# Altium PCB 175-00061, rev2, PCB, NRES Crate Slot MotherBoard.PcbDoc (part 2 of 2)
Units mm, origin at the board's own origin, x right, y up, seen from the top; angles counter-clockwise.
Board outline 222 x 100 mm, 6 copper layers (Top Layer (*.GTL), MidLayer1 (*G1), InternalPlane1 (*.GP1), InternalPlane2 (*.GP2), InternalPlane3 (*.GP3), Bottom Layer (*GBL)); 58 components, 62 nets, 611 pads, 118 vias.
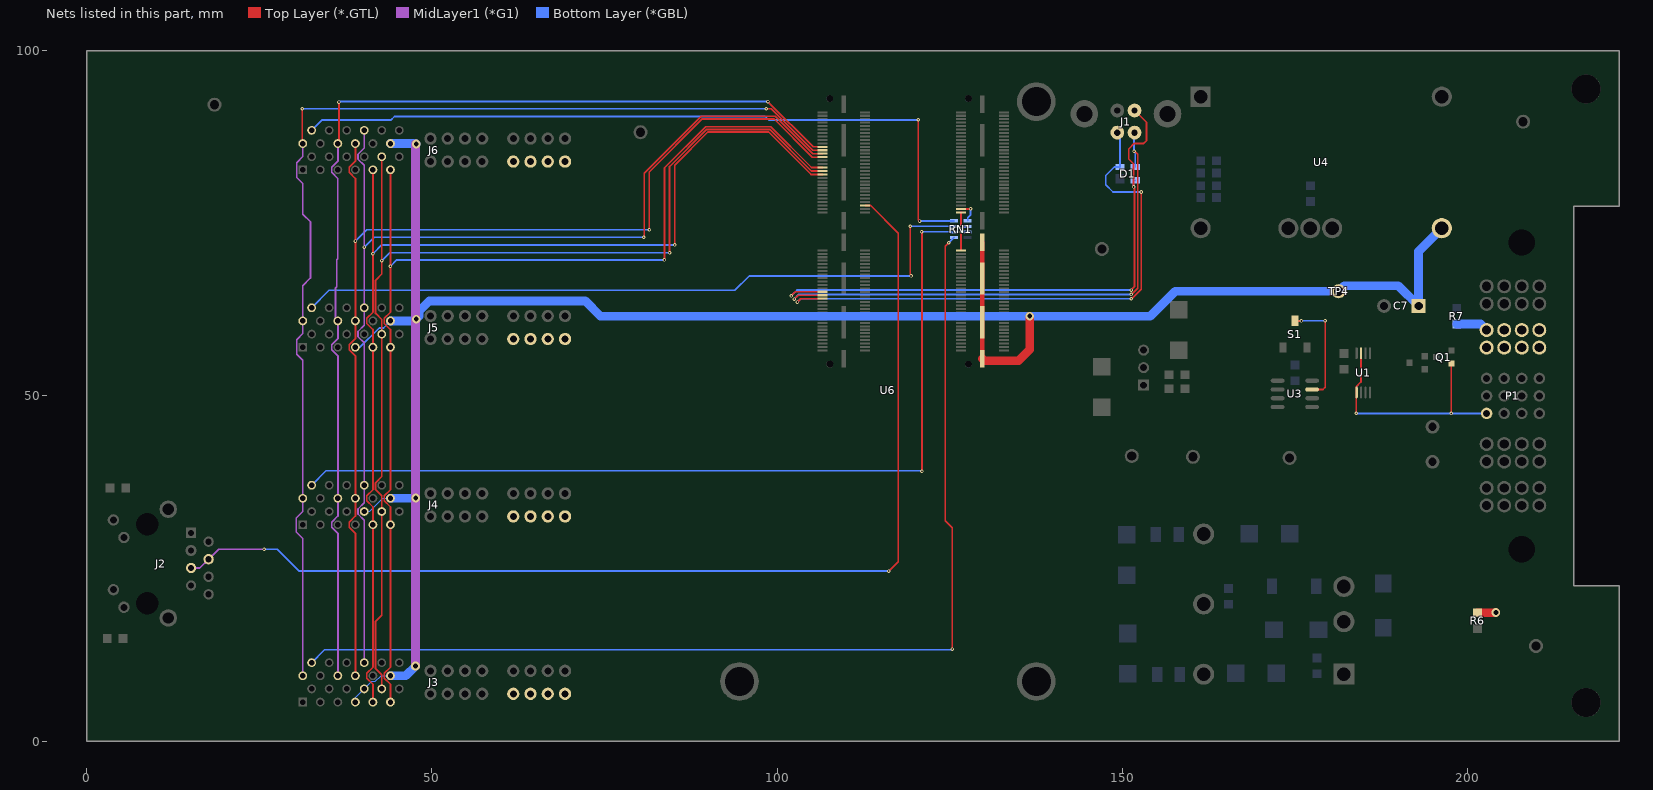
[diagram p6: the nets of this part, all layers, seen from the top]

## Via types
v1: diameter 0.508, hole 0.254, Top Layer (*.GTL) to Bottom Layer (*GBL), tented both sides, 100 vias
v2: diameter 1.27, hole 0.711, Top Layer (*.GTL) to Bottom Layer (*GBL), 18 vias

## Nets (pads, with @x,y where several pads share a name; then routed paths per layer and width w, separated by ;. In a path a pad name is that pad's centre, name@x,y a point inside that pad or via, vN(x,y) a via of type N, cw(c..) or ccw(c..) an arc to the next point about the centre after c; other vN are vias at no path point) (continued)
NetRN1_4: RN1.4 U6.B59 | length 3.6
  Top Layer (*.GTL) w0.254: U6.B59@126.651,71.078 126.651,73.757 v1(126.659,73.765)
  Bottom Layer (*GBL) w0.254: v1(126.659,73.765) RN1.4@127.599,73.765
NetRN1_6: RN1.6 U6.B61 | length 3
  Top Layer (*.GTL) w0.254: U6.B61@126.651,76.578 126.651,74.561 v1(126.685,74.527)
  Bottom Layer (*GBL) w0.254: v1(126.685,74.527) 127.561,74.527 RN1.6@127.599,74.565
NetRN1_8: RN1.8 U6.B63 | length 3.3
  Top Layer (*.GTL) w0.254: U6.B63@126.651,77.078 127.991,77.078 v1(128.031,77.118)
  Bottom Layer (*GBL) w0.254: RN1.8@127.599,75.365 127.599,75.823 128.031,76.255 v1(128.031,77.118)
NetS1_2: S1.2 U3.7 | length 16
  Top Layer (*.GTL) w0.254: S1.2@175.045,60.858 v1(175.946,60.858) ; U3.7@177.506,50.927 179.07,50.927 179.4,51.257 179.4,60.858 v1(179.375,60.884)
  Bottom Layer (*GBL) w0.254: v1(175.946,60.858) 175.971,60.884 v1(179.375,60.884)
SCLK: J3.11 J4.11 J5.11 J6.11 U6.A87 | length 160.5
  Top Layer (*.GTL) w0.254: J3.11@43.989,5.643 43.989,8.195 43.1,9.084 43.1,9.821 43.989,10.71 J4.11@43.989,31.343 43.989,33.895 43.1,34.784 43.1,35.521 43.989,36.41 J5.11@43.989,57.042 43.989,59.595 43.1,60.484 43.1,61.221 43.989,62.11 v1(43.989,68.787) J6.11@43.989,82.742 ; v1(83.682,69.698) 83.682,83.029 89.633,88.98 99.079,88.98 104.98,83.078 U6.A87@106.581,83.078
  Bottom Layer (*GBL) w0.254: v1(43.989,68.787) 44.9,69.698 v1(83.682,69.698)
SILICON_SN: J3.17 J4.17 J5.17 J6.17 U6.A99 | length 158.5
  Top Layer (*.GTL) w0.254: J6.17@36.369,86.552 36.515,86.698 v1(36.515,92.561) ; v1(98.663,92.628) 105.213,86.078 U6.A99@106.581,86.078
  MidLayer1 (*G1) w0.254: J3.17@36.369,9.453 36.369,30.085 35.48,30.974 35.48,31.711 36.369,32.6 J4.17@36.369,35.153 36.369,55.785 35.48,56.674 35.48,57.411 36.369,58.3 36.369,60.786 36.007,61.149 36.007,65.612 36.21,65.816 36.21,68.736 36.21,69.697 36.362,69.849 36.362,81.492 35.48,82.374 35.48,83.111 36.369,84 J6.17@36.369,86.552 J6.17@36.369,86.567
  Bottom Layer (*GBL) w0.254: v1(36.515,92.561) 36.582,92.628 v1(98.663,92.628)
T: J3.P2 J4.P2 J5.P2 J6.P2 P1.15 R6.2 R7.1 | length 7.4
  Top Layer (*.GTL) w1.27: R6.2@201.473,18.593 204.089,18.593 v2(204.114,18.618)
  Bottom Layer (*GBL) w1.27: R7.1@198.45,60.401 201.914,60.401 P1.15@202.79,59.525
USB_D+: D1.4 J1.3 U6.A35 | length 84.6
  Top Layer (*.GTL) w0.254: v1(102.038,64.478) 102.638,65.078 U6.A35@106.581,65.078 ; v1(151.297,65.333) 151.754,65.79 151.754,80.141 v1(151.627,80.268) 151.627,83.621 150.942,84.306 150.942,85.754 151.754,86.567 153.101,86.567 153.507,86.973 153.507,89.61 J1.3@151.781,91.336
  Bottom Layer (*GBL) w0.254: v1(102.038,64.478) 102.892,65.333 v1(151.297,65.333) ; v1(151.627,80.268) 151.627,81.012 D1.4@151.864,81.248
USB_D-: D1.3 J1.2 U6.A33 | length 80
  Top Layer (*.GTL) w0.254: v1(102.487,64.029) 103.036,64.578 U6.A33@106.581,64.578 ; v1(151.297,64.698) 151.381,64.698 152.254,65.571 152.254,77.271 152.246,77.279 152.246,85.008 151.831,85.424 v1(151.704,85.424)
  Bottom Layer (*GBL) w0.254: v1(102.487,64.029) 103.155,64.698 v1(151.297,64.698) ; J1.2@151.781,88.136 151.704,88.059 v1(151.704,85.424) 151.864,85.264 D1.3@151.864,83.148
USB_VBUS: D1.2 J1.1 U6.A31 | length 83.2
  Top Layer (*.GTL) w0.254: v1(102.936,63.58) 103.434,64.078 U6.A31@106.581,64.078 ; v1(151.297,64.063) 151.381,64.063 152.754,65.436 v1(152.754,79.531)
  Bottom Layer (*GBL) w0.254: v1(102.936,63.58) 103.418,64.063 v1(151.297,64.063) ; J1.1@149.281,88.136 149.664,87.753 D1.2@149.664,83.148 148.844,83.148 147.614,81.919 147.614,80.573 148.656,79.531 v1(152.754,79.531)
VA25: J2.4 J2.5 U6.A66 | length 159.5
  Top Layer (*.GTL) w0.254: U6.A66@112.761,77.578 113.539,77.578 117.541,73.577 117.541,25.988 v1(116.169,24.616)
  MidLayer1 (*G1) w0.254: J2.5@15.1,25.065 16.37,25.065 J2.4@17.64,26.335 19.096,27.791 v1(25.669,27.791)
  Bottom Layer (*GBL) w0.254: v1(25.669,27.791) 27.574,27.791 30.749,24.616 v1(116.169,24.616)
VCC: C7.1 J3.7 J3.8 J3.23 J4.8 J4.23 J5.7 J5.23 J6.23 TP4.1 U4.6 U6.B121 | length 302.1
  Top Layer (*.GTL) w0.635: U6.B121@129.741,55.383 U6.B121@129.741,60.653 U6.B121@129.741,67.003 U6.B121@129.741,72.273
  Top Layer (*.GTL) w1.27: U6.B121@129.741,55.383 130.031,55.093 134.976,55.093 136.601,56.718 v2(136.601,61.544)
  MidLayer1 (*G1) w1.27: v2(47.625,10.871) v2@47.625,86.487
  Bottom Layer (*GBL) w0.127: J3.7@38.909,5.643 38.909,6.278 J3.8@40.179,7.548 41.259,8.627 41.791,8.627 42.617,9.453 J3.23@43.989,9.453 ; J4.8@40.179,33.248 40.995,33.248 42.9,35.153 J4.23@43.989,35.153
  Bottom Layer (*GBL) w0.254: J5.7@38.909,57.042 39.557,57.042 42.351,59.836 42.973,59.836 J5.23@43.989,60.852
  Bottom Layer (*GBL) w1.27: J3.23@43.989,9.453 46.206,9.453 v2(47.625,10.871) ; J4.23@43.989,35.153 47.599,35.153 v2(47.65,35.204) ; J5.23@43.989,60.852 47.467,60.852 v2(47.727,61.112) 48.13,61.515 48.13,62.25 49.633,63.754 72.212,63.754 74.422,61.544 v2(136.601,61.544) 154.051,61.544 157.662,65.155 TP4.1@181.345,65.155 182.154,65.964 189.985,65.964 C7.1@192.928,63.021 192.928,70.934 U4.6@196.281,74.286 ; J6.23@43.989,86.552 47.661,86.552 v2(47.727,86.487)
WSTRB: J3.13 J4.13 J5.13 J6.13 U6.A97 | length 163.2
  Top Layer (*.GTL) w0.254: v1(31.206,91.596) 31.206,86.636 J6.13@31.289,86.552 ; v1(98.44,91.596) 99.156,91.596 105.174,85.578 U6.A97@106.581,85.578
  MidLayer1 (*G1) w0.254: J3.13@31.289,9.453 31.289,29.34 30.353,30.277 30.353,32.309 31.289,33.245 J4.13@31.289,35.153 31.289,55.147 30.4,56.036 30.4,58.137 31.289,59.026 31.289,60.786 31.282,60.793 31.282,65.968 32.4,67.086 32.4,75.2 31.282,76.318 31.282,80.757 30.4,81.639 30.4,83.791 31.289,84.68 J6.13@31.289,86.552 J6.13@31.289,86.567
  Bottom Layer (*GBL) w0.254: v1(31.206,91.596) v1(98.44,91.596)
~BRD_PRESENT_0: J3.14 RN1.1 | length 154.2
  Top Layer (*.GTL) w0.254: v1(124.856,72.165) 124.348,71.657 124.348,31.906 125.364,30.89 v1(125.364,13.313)
  Bottom Layer (*GBL) w0.254: J3.14@32.559,11.358 34.439,13.237 125.288,13.237 v1(125.364,13.313) ; v1(124.856,72.165) 125.649,72.958 RN1.1@125.649,72.965
~BRD_PRESENT_1: J4.14 RN1.3 | length 128.8
  Top Layer (*.GTL) w0.254: v1(120.919,73.791) 120.97,73.74 v1(120.97,39.094)
  Bottom Layer (*GBL) w0.254: J4.14@32.559,37.058 34.647,39.145 120.919,39.145 v1(120.97,39.094) ; v1(120.919,73.791) 125.624,73.791 RN1.3@125.649,73.765
~BRD_PRESENT_2: J5.14 RN1.5 | length 102.3
  Top Layer (*.GTL) w0.254: v1(119.293,74.553) 119.293,67.466 v1(119.395,67.365)
  Bottom Layer (*GBL) w0.254: J5.14@32.559,62.757 35.084,65.282 93.868,65.282 95.951,67.365 v1(119.395,67.365) ; v1(119.293,74.553) 119.306,74.565 RN1.5@125.649,74.565
~BRD_PRESENT_3: J6.14 RN1.7 | length 108.8
  Top Layer (*.GTL) w0.254: v1(120.462,89.996) 120.462,75.493 v1(120.639,75.315)
  Bottom Layer (*GBL) w0.254: J6.14@32.559,88.457 34.047,89.945 44.047,89.945 44.577,90.475 98.29,90.475 98.82,89.945 120.411,89.945 v1(120.462,89.996) ; v1(120.639,75.315) 125.598,75.315 RN1.7@125.649,75.365
~CS_SLOT: P1.4 Q1.1 U1.1 U1.7 | length 35.1
  Top Layer (*.GTL) w0.254: v1(183.896,47.473) 183.896,51.332 184.587,52.023 U1.7@184.587,56.19 ; v1(197.65,47.46) 197.65,54.648 Q1.1@197.688,54.686
  Bottom Layer (*GBL) w0.254: v1(183.896,47.473) 183.909,47.46 v1(197.65,47.46) P1.4@202.79,47.46
~DRDY: J3.9 J4.9 J5.9 J6.9 U6.A83 | length 161.1
  Top Layer (*.GTL) w0.254: J3.9@41.449,5.643 41.449,8.195 40.56,9.084 40.56,9.821 41.449,10.71 J4.9@41.449,31.343 41.449,33.895 40.56,34.784 40.56,35.521 41.449,36.41 J5.9@41.449,57.042 41.449,59.595 40.56,60.484 40.56,61.221 41.449,62.11 v1(41.449,70.59) J6.9@41.449,82.742 ; v1@85.156,71.869 85.156,83.424 89.949,88.218 98.763,88.218 104.903,82.078 U6.A83@106.581,82.078
  Bottom Layer (*GBL) w0.254: v1(41.449,70.59) 42.729,71.869 v1(85.181,71.869)
~LDAC: J3.19 J4.19 J5.19 J6.19 U6.A93 | length 161.5
  Top Layer (*.GTL) w0.254: J3.19@38.909,9.453 38.909,30.085 38.02,30.974 38.02,31.711 38.909,32.6 J4.19@38.909,35.153 38.909,55.785 38.02,56.674 38.02,57.411 38.909,58.3 J5.19@38.909,60.852 v1(38.909,72.419) 38.909,81.485 38.02,82.374 38.02,83.111 38.909,84 J6.19@38.909,86.552 ; v1@81.473,74.054 81.473,82.435 89.16,90.123 99.552,90.123 105.097,84.578 U6.A93@106.581,84.578
  Bottom Layer (*GBL) w0.254: v1(38.909,72.419) 40.544,74.054 v1(81.498,74.054)
~RESET: J3.20 J4.20 J5.20 J6.20 U6.A95 | length 160.6
  Top Layer (*.GTL) w0.254: v1@80.736,72.987 80.736,82.238 89.002,90.504 99.71,90.504 105.135,85.078 U6.A95@106.581,85.078
  MidLayer1 (*G1) w0.254: J3.20@40.179,11.358 40.179,31.99 39.29,32.879 39.29,33.616 40.179,34.505 J4.20@40.179,37.058 40.179,57.69 39.29,58.579 39.29,59.316 40.179,60.205 J5.20@40.179,62.186 ; J5.20@40.179,62.757 v1(40.179,71.556) 40.179,83.39 39.29,84.279 39.29,85.016 40.179,85.905 J6.20@40.179,88.457
  Bottom Layer (*GBL) w0.254: v1(40.179,71.556) 41.611,72.987 v1(80.685,72.987)
~SHDN: J3.10 J4.10 J5.10 J6.10 U6.A85 | length 160.9
  Top Layer (*.GTL) w0.254: J3.10@42.719,7.548 42.719,9.58 41.83,10.469 41.83,17.327 42.719,18.216 J4.10@42.719,33.248 42.719,35.503 41.83,36.392 41.83,37.426 42.719,38.315 J5.10@42.719,58.947 42.719,61.058 41.83,61.947 41.83,66.745 42.738,67.652 v1(42.738,69.6) 42.738,75.433 42.719,75.452 J6.10@42.719,84.647 ; v1(84.419,70.73) 84.419,83.227 89.791,88.599 98.921,88.599 104.941,82.578 U6.A85@106.581,82.578
  Bottom Layer (*GBL) w0.254: v1(42.738,69.6) 43.868,70.73 v1(84.419,70.73)
pads on no net: J2.7 J2.MH1 J2.MH2 J3.15 J3.16 J4.15 J4.16 J5.15 J5.16 J6.15 J6.16 P1.0 P1.1 P1.7 P1.8 P1.9 P1.10 PS1.1 U4.3 U4.5 U6.0 U6.1 U6.A2 U6.A4 U6.A6 U6.A7 U6.A8 U6.A9 U6.A10 U6.A11 U6.A12 U6.A13 U6.A14 U6.A15 U6.A16 U6.A17 U6.A18 U6.A19 U6.A20 U6.A21 U6.A22 U6.A23 U6.A24 U6.A25 U6.A26 U6.A27 U6.A28 U6.A29 U6.A30 U6.A32 U6.A34 U6.A36 U6.A37 U6.A38 U6.A39 U6.A40 U6.A41 U6.A42 U6.A43 U6.A44 U6.A45 U6.A46 U6.A47 U6.A48 U6.A49 U6.A50 U6.A51 U6.A52 U6.A53 U6.A54 U6.A55 U6.A56 U6.A57 U6.A58 U6.A59 U6.A60 U6.A61 U6.A62 U6.A63 U6.A64 U6.A65 U6.A67 U6.A69 U6.A72 U6.A74 U6.A76 U6.A78 U6.A80 U6.A82 U6.A84 U6.A86 U6.A88 U6.A90 U6.A92 U6.A94 U6.A96 U6.A98 U6.A100 U6.A101 U6.A102 U6.A104 U6.A106 U6.A107 U6.A108 U6.A110 U6.A112 U6.A113 U6.A114 U6.A115 U6.A116 U6.A117 U6.A118 U6.A119 U6.A120 U6.B1 U6.B2 U6.B3 U6.B4 U6.B5 U6.B6 U6.B7 U6.B8 U6.B9 U6.B10 U6.B11 U6.B12 U6.B13 U6.B14 U6.B15 U6.B16 U6.B17 U6.B18 U6.B19 U6.B20 U6.B21 U6.B22 U6.B23 U6.B24 U6.B25 U6.B26 U6.B27 U6.B28 U6.B29 U6.B30 U6.B31 U6.B32 U6.B33 U6.B34 U6.B35 U6.B36 U6.B37 U6.B38 U6.B39 U6.B40 U6.B41 U6.B42 U6.B43 U6.B44 U6.B45 U6.B46 U6.B47 U6.B48 U6.B49 U6.B50 U6.B51 U6.B52 U6.B53 U6.B54 U6.B56 U6.B58 U6.B60 U6.B62 U6.B64 U6.B66 U6.B68 U6.B70 U6.B71 U6.B72 U6.B73 U6.B74 U6.B75 U6.B76 U6.B77 U6.B78 U6.B79 U6.B80 U6.B81 U6.B82 U6.B83 U6.B84 U6.B85 U6.B86 U6.B87 U6.B88 U6.B89 U6.B90 U6.B91 U6.B92 U6.B93 U6.B94 U6.B95 U6.B96 U6.B97 U6.B98 U6.B99 U6.B100 U6.B101 U6.B102 U6.B103 U6.B104 U6.B105 U6.B106 U6.B107 U6.B108 U6.B109 U6.B110 U6.B111 U6.B112 U6.B113 U6.B114 U6.B115 U6.B116 U6.B117 U6.B118 U6.B119 U6.B120
copper on no net: | length 10
  Bottom Layer (*GBL) w0.127: 96.028,45.949 ccw(c94.437,45.949) 96.028,45.949

## Polygon pours and split planes (outlines as drawn)
D on InternalPlane1 (*.GP1) (split plane): 221.49,78.01 215.4,78.01 215.3,78.001 215.205,77.972 215.116,77.924 215.039,77.861 214.976,77.784 214.928,77.695 214.899,77.6 214.89,77.5 214.89,22.5 214.899,22.4 214.928,22.305 214.976,22.216 215.039,22.139 215.116,22.076 215.205,22.028 215.3,21.999 215.4,21.99 221.49,21.99 221.49,0.51 0.51,0.51 0.51,99.49 221.49,99.49
NetF1_1 on InternalPlane2 (*.GP2) (split plane): 214.89,32.096 191.537,32.279 191.537,39.73 194.387,42.58 197.281,42.58 197.347,42.589 197.409,42.614 197.462,42.655 200.071,45.264 214.89,45.264
T on InternalPlane2 (*.GP2) (split plane): 221.49,78.01 215.4,78.01 215.3,78.001 215.205,77.972 215.116,77.924 215.039,77.861 214.976,77.784 214.928,77.695 214.899,77.6 214.89,77.5 214.89,45.777 199.965,45.777 199.898,45.768 199.88,45.76 199.837,45.742 199.784,45.702 197.174,43.092 194.281,43.092 194.214,43.084 194.189,43.073 194.153,43.058 194.099,43.017 191.099,40.017 191.059,39.964 191.033,39.903 191.024,39.836 191.024,32.025 191.029,31.992 191.033,31.96 191.033,31.959 191.033,31.958 191.046,31.928 191.058,31.898 191.058,31.897 191.059,31.897 191.078,31.871 191.098,31.845 191.099,31.844 191.099,31.843 191.125,31.824 191.151,31.804 191.152,31.803 191.153,31.803 191.183,31.79 191.212,31.778 191.213,31.778 191.214,31.777 191.246,31.773 191.279,31.768 214.89,31.584 214.89,22.5 214.899,22.4 214.928,22.305 214.976,22.216 215.039,22.139 215.116,22.076 215.205,22.028 215.3,21.999 215.4,21.99 221.49,21.99 221.49,0.51 0.51,0.51 0.51,99.49 221.49,99.49
+24V on InternalPlane3 (*.GP3) (split plane): 221.49,78.01 215.4,78.01 215.3,78.001 215.205,77.972 215.116,77.924 215.039,77.861 214.976,77.784 214.928,77.695 214.899,77.6 214.89,77.5 214.89,22.5 214.899,22.4 214.928,22.305 214.976,22.216 215.039,22.139 215.116,22.076 215.205,22.028 215.3,21.999 215.4,21.99 221.49,21.99 221.49,0.51 0.51,0.51 0.51,99.49 221.49,99.49

## Keep-outs
Keep-Out Layer:
  lines w0.203: 1.93,8.103 1.93,91.923 6.375,91.923 6.375,97.003 214.655,97.003 214.655,91.923 218.465,91.923 218.465,8.103 214.655,8.103 214.655,3.023 6.375,3.023 6.375,8.103 1.93,8.103

## Other copper
Top Layer (*.GTL):
  text "*.GTL - TOP LAYER GERBER DATA" at 76.431,-26.476 h2.03
MidLayer1 (*G1):
  text "*.G1 - MID LAYER 1 GERBER DATA" at 76.431,-26.476 h2.03
Bottom Layer (*GBL):
  text "175-00061 rev 2" at 95.555,51.689 h1.52
  text "PCB, NRES, CRATE MOTHERBOARD" at 95.606,48.819 h1.52
  text "c" at 94.945,45.466 h1.52
  text "2013, Las Cumbres Observatory" at 91.084,45.415 h1.52
  text "*.GBL - BOTTOM LAYER GERBER DATA" at 76.431,-26.476 h2.03
InternalPlane1 (*.GP1) (plane layer: these items are gaps in the copper):
  text "*.GP1 - INTERNAL PLANE LAYER 1 GERBER DATA" at 76.431,-26.476 h2.03
InternalPlane2 (*.GP2) (plane layer: these items are gaps in the copper):
  lines w0.508: 215.4,31.836 191.281,32.025 191.281,39.836 194.281,42.836 197.281,42.836 199.965,45.521 215.4,45.521
  text "*.GP2 - INTERNAL PLANE LAYER 2 GERBER DATA" at 76.431,-26.476 h2.03
InternalPlane3 (*.GP3) (plane layer: these items are gaps in the copper):
  text "*.GP3- INTERNAL PLANE LAYER 3 GERBER DATA" at 76.431,-26.476 h2.03

## Silkscreen, mask and mechanical layers (free items; w line width, h text height)
Top Overlay:
  rectangle: 7.747,70.053 12.675,76.276
  text "SLOT_0" at 37.871,92.05 h3.05
  text "AGND" at 18.618,88.773 h1.52
  text "AGND" at 82.22,87.706 h1.52
  text "AGND" at 207.137,85.623 h1.52
  text "+5V" at 145.059,67.208 h1.52
  text "SLOT_1" at 38.202,67.081 h3.05
  text "VCC" at 175.539,64.338 h1.52
  text "PGM" at 168.656,58.42 h1.02
  text "780-00057  rev:" at 10.871,47.142 h1.52 r90
  text "SCH, NRES, CRATE  MOTHERBOARD" at 15.57,45.161 h1.52 r90
  text "SLOT_2" at 36.449,41.656 h3.05
  text "-12V" at 148.768,37.77 h1.52
  text "+12V" at 159.309,37.592 h1.52
  text "+24V" at 171.755,37.541 h1.52
  text "LINK A/T GND" at 198.958,20.193 h1.02
  text "SLOT_3" at 36.703,15.646 h3.05
  text "AGND" at 207.95,10.16 h1.52
  text "*.GTO - TOP OVERLAY GERBER DATA" at 76.431,-26.476 h2.03
Bottom Overlay:
  text "LINK D/T GND" at 198.552,64.465 h1.02 r270
  text "*GBO - BOTTOM OVERLAY GERBER DATA" at 76.431,-26.476 h2.03
Top Paste:
  text "*.GTP - TOP-SIDE SOLDER PASTE MASK" at 76.431,-26.476 h2.03
Bottom Paste:
  text "*.GBP - BOTTOM-SIDE SOLDER PASTE MASK" at 76.431,-26.476 h2.03
Top Solder:
  text "*.GTS - TOP SOLDER MASK GERBER DATA" at 76.431,-26.476 h2.03
Bottom Solder:
  rectangle: 45.161,43.028 97.231,54.458
  text "*.GBS - BOTTOM SOLDER MASK GERBER DATA" at 76.431,-26.476 h2.03
Mechanical 1:
  the board outline again, w1
Mechanical 2:
  lines w0.254: -251.102,-245.119 282.298,-245.119 282.298,161.281 -251.102,161.281 -251.102,-245.119 ; 179.301,-242.427 ccw(c180.571,-242.427) 180.571,-243.697 188.953,-243.697 ccw(c188.953,-242.681) 189.969,-242.681 189.969,-238.363 ccw(c188.953,-238.363) 188.953,-237.347 179.301,-237.347 179.301,-242.427 ; 179.301,-235.061 ccw(c180.571,-235.061) 180.571,-236.331 279.631,-236.331 ccw(c279.631,-235.061) 280.901,-235.061 280.901,-230.235 ccw(c279.631,-230.235) 279.631,-228.965 179.301,-228.965 179.301,-235.061 ; 179.301,-226.679 ccw(c180.571,-226.679) 180.571,-227.949 228.323,-227.949 ccw(c228.323,-226.679) 229.593,-226.679 229.593,-222.869 ccw(c228.323,-222.869) 228.323,-221.599 179.301,-221.599 179.301,-226.679 ; 179.301,-219.567 ccw(c180.317,-219.567) 180.317,-220.583 200.891,-220.583 ccw(c200.891,-219.313) 202.161,-219.313 202.161,-215.503 ccw(c200.891,-215.503) 200.891,-214.233 179.301,-214.233 179.301,-219.567 ; 190.985,-242.681 ccw(c192.001,-242.681) 192.001,-243.697 241.785,-243.697 ccw(c241.785,-242.681) 242.801,-242.681 242.801,-238.363 ccw(c241.785,-238.363) 241.785,-237.347 190.985,-237.347 190.985,-242.681 ; 203.177,-219.313 ccw(c204.447,-219.313) 204.447,-220.583 228.323,-220.583 ccw(c228.323,-219.313) 229.593,-219.313 229.593,-215.503 ccw(c228.323,-215.503) 228.323,-214.233 203.177,-214.233 203.177,-219.313 ; 230.609,-226.679 ccw(c231.879,-226.679) 231.879,-227.949 279.631,-227.949 ccw(c279.631,-226.679) 280.901,-226.679 280.901,-222.869 ccw(c279.631,-222.869) 279.631,-221.599 230.609,-221.599 230.609,-226.679 ; 230.609,-219.313 ccw(c231.879,-219.313) 231.879,-220.583 255.755,-220.583 ccw(c255.755,-219.313) 257.025,-219.313 257.025,-215.503 ccw(c255.755,-215.503) 255.755,-214.233 230.609,-214.233 230.609,-219.313 ; 243.817,-242.427 ccw(c245.087,-242.427) 245.087,-243.697 253.469,-243.697 ccw(c253.469,-242.681) 254.485,-242.681 254.485,-238.363 ccw(c253.469,-238.363) 253.469,-237.347 243.817,-237.347 243.817,-242.427 ; 255.501,-242.681 ccw(c256.517,-242.681) 256.517,-243.697 279.631,-243.697 ccw(c279.631,-242.427) 280.901,-242.427 280.901,-238.617 ccw(c279.631,-238.617) 279.631,-237.347 255.501,-237.347 255.501,-242.681 ; 258.041,-219.313 ccw(c259.311,-219.313) 259.311,-220.583 279.631,-220.583 ccw(c279.631,-219.313) 280.901,-219.313 280.901,-215.503 ccw(c279.631,-215.503) 279.631,-214.233 258.041,-214.233 258.041,-219.313
  lines w0.406: -218.542,-136.43 -73.203,-136.43 ; -218.542,-128.942 -73.203,-128.942 ; -220.066,-201.219 ccw(c-217.653,-201.219) -217.653,-203.632 -74.092,-203.632 ccw(c-74.092,-201.219) -71.679,-201.219 -71.679,-116.713 ccw(c-74.092,-116.713) -74.092,-114.3 -217.653,-114.3 ccw(c-217.653,-116.713) -220.066,-116.713 -220.066,-201.219
  lines w0.508: -250.592,-228.714 cw(c-249.324,-230.616) -249.324,-228.33 ; -249.324,-229.346 ccw(c-249.324,-230.616) -250.594,-230.616 -250.594,-243.062 ccw(c-249.324,-243.062) -249.324,-244.332 -168.044,-244.332 ccw(c-168.044,-243.062) -166.774,-243.062 -166.774,-234.426 ccw(c-168.044,-234.426) -168.044,-233.156 -235.1,-233.156 ; -166.142,-244.33 ccw(c-168.044,-243.062) -165.758,-243.062 -165.758,-234.426 ; 178.188,-244.712 cw(c180.571,-242.427) 177.269,-242.427 177.269,-200.009 cw(c180.571,-200.009) 180.571,-196.707 279.631,-196.707 cw(c279.631,-200.009) 281.883,-197.594 ; -59.84,-240.547 ccw(c-56.538,-240.547) -56.538,-243.849 63.858,-243.849 ccw(c63.858,-240.547) 67.16,-240.547 67.16,-200.161 ccw(c63.858,-200.161) 63.858,-196.859 -56.538,-196.859 ccw(c-56.538,-200.161) -59.84,-200.161 -59.84,-240.547 ; 178.285,-242.427 ccw(c180.571,-242.427) 180.571,-244.713 279.631,-244.713 ccw(c279.631,-242.427) 281.917,-242.427 281.917,-200.009 ccw(c279.631,-200.009) 279.631,-197.723 180.571,-197.723 ccw(c180.571,-200.009) 178.285,-200.009 178.285,-242.427
  lines w0.61: 4.93,-239.785 8.74,-239.785 ; 4.93,-233.435 8.74,-233.435 ; 4.93,-227.085 8.74,-227.085 ; 4.93,-220.735 8.74,-220.735 ; 4.93,-214.385 8.74,-214.385
  lines w0.762: -263.802,-257.819 294.998,-257.819 294.998,173.981 -263.802,173.981 -263.802,-257.819
  lines w1.27: 182.984,-210.448 224.894,-210.448 ; 182.984,-200.796 224.894,-200.796 ; 224.894,-210.448 182.73,-210.448 182.73,-200.796 224.894,-200.796 ; 224.894,-210.448 224.894,-200.796
  text "NOTES (UNLESS OTHERWISE SPECIFIED):" at -242.974,147.971 h2.29
  text "GENERAL" at -240.434,142.891 h2.29
  text "1)" at -237.894,137.81 h1.91
  text "PCB IS 6-LAYER, .062\" THICK." at -232.814,137.811 h1.91
  text "2)" at -237.894,134 h1.91
  text "CONSTRUCTION IS SOLDER-MASK-OVER-BARE-COPPER (SMOBC)." at -232.814,134 h1.91
  text "3)" at -237.894,130.19 h1.91
  text "ACCEPTABILITY SHALL BE BASED ON IPC-A-600, CLASS 2." at -232.814,130.19 h1.91
  text "4)" at -237.894,126.38 h1.91
  text "THE FOLLOWING GERBER RS274X PHOTO TOOL FILES SHALL BE USED TO DEFINE ALL CIRCUIT FEATURES:" at -232.814,126.38 h1.91
  text "*.GTL - TOP LAYER GERBER DATA" at -225.854,121.022 h2.03
  text "*.G1 - MID LAYER 1 GERBER DATA" at -225.854,117.119 h2.03
  text "*.GP1 - INTERNAL PLANE LAYER 1 GERBER DATA" at -225.854,105.41 h2.03
  text "*.GP2 - INTERNAL PLANE LAYER 2 GERBER DATA" at -225.854,101.506 h2.03
  text "*.GP3- INTERNAL PLANE LAYER 3 GERBER DATA" at -225.854,97.603 h2.03
  text "*.GBL - BOTTOM LAYER GERBER DATA" at -225.854,85.894 h2.03
  text "*.GTO - TOP OVERLAY GERBER DATA" at -225.854,81.991 h2.03
  text "*.GTS - TOP SOLDER MASK GERBER DATA" at -225.854,78.088 h2.03
  text "*.GTP - TOP-SIDE SOLDER PASTE MASK" at -225.854,74.184 h2.03
  text "*GBO - BOTTOM OVERLAY GERBER DATA" at -225.854,70.281 h2.03
  text "*.GBS - BOTTOM SOLDER MASK GERBER DATA" at -225.854,66.378 h2.03
  text "*.GBP - BOTTOM-SIDE SOLDER PASTE MASK" at -225.854,62.475 h2.03
  text "5)" at -240.357,44.295 h1.91
  text "THE PHOTO TOOL SHALL NOT BE COMPENSATED WITHOUT PRIOR ENGINEERING APPROVAL." at -235.277,44.295 h1.91
  text "PCB DESIGNER: RICH LOBDILL   PH (805) 880-1621  FAX (805) 961-1792." at -235.277,40.486 h1.91
  text "FABRICATION TOLERANCES" at -238.96,32.198 h2.29
  text "6)" at -236.42,27.117 h1.91
  text "END PRODUCT CONDUCTOR WIDTHS AND PAD DIAMETERS SHALL NOT VARY MORE THAN" at -231.34,27.117 h1.91
  text "0.002\" FROM THE 1:1 DIMENSIONS OF THE MASTER ARTWORK." at -231.34,23.308 h1.91
  text "7)" at -236.42,19.497 h1.91
  text "THE CONDUCTIVE PATTERN SHALL BE POSITIONED SO THAT THE LOCATION OF ANY PAD OR" at -231.34,19.497 h1.91
  text "LAND SHALL BE WITHIN 0.005\" DIAMETER TO THE TRUE POSITION OF THE HOLE IT CIRCUMSCRIBES." at -231.34,15.688 h1.91
  text "8)" at -236.42,11.877 h1.91
  text "ALL DRILL HOLE SIZES AND TOLERANCES APPLY AFTER PLATING." at -231.34,11.877 h1.91
  text "9)" at -236.42,8.067 h1.91
  text "THE MINIMUM ANNULAR RING SHALL BE 0.005\"." at -231.34,8.067 h1.91
  text "10)" at -237.817,4.257 h1.91
  text "BOW AND TWIST SHALL NOT EXCEED 0.010\" PER INCH." at -231.34,4.257 h1.91
  text "11)" at -237.563,0.447 h1.91
  text "FOR PCB ROUTING DIMENSIONS: .XXX = +/-.005\"  .XX = +/-.020\"" at -231.34,0.447 h1.91
  text "MATERIAL" at -238.96,-4.632 h2.29
  text "12)" at -237.817,-9.713 h1.91
  text "BASE MATERIAL IS FR4 EPOXY FIBERGLASS" at -231.163,-9.864 h1.91
  text "SEE STACK-UP LEGEND FOR COPPER CLADDING CALL OUTS" at -231.163,-13.42 h1.91
  text "13)" at -237.817,-13.523 h1.91
  text "PLATING" at -238.96,-18.602 h2.29
  text "14)" at -237.817,-23.556 h1.91
  text "ALL HOLES AND CONDUCTIVE SURFACES SHALL BE PLATED WITH A MINIMUM OF 0.001\" COPPER." at -231.34,-23.556 h1.91
  text "15)" at -237.817,-27.366 h1.91
  text "AFTER SOLDERMASK, ALL EXPOSED HOLES AND CONDUCTIVE SURFACES SHALL BE COATED" at -231.34,-27.366 h1.91
  text "WITH A GOLD IMMERSION PLATING TO PRESERVE SOLDERABILITY." at -231.163,-31.2 h1.91
  text "16)" at -237.157,-35.823 h1.91
  text "COPPER THEVING ON LAYERS AS NEEDED" at -231.086,-35.875 h1.91
  text "COATINGS" at -238.96,-43.748 h2.29
  text "THE SOLDERMASK SHALL BE RED LIQUID PHOTO-IMAGEABLE PER IPC-SM-840, TYPE-B, CLASS 2." at -231.34,-48.702 h1.91
  text "17)" at -237.538,-48.777 h1.91
  text "THE SOLDERMASK REGISTRATION ALLOWANCE IS 0.003\".  THERE SHALL BE NO SOLDERMASK ON" at -231.34,-52.512 h1.91
  text "18)" at -237.792,-53.222 h1.91
  text "ANY SOLDER PAD OR LAND." at -231.34,-56.322 h1.91
  text "MARKING" at -238.96,-61.401 h2.29
  text "THE LEGEND SHALL BE SCREEN-PRINTED USING PERMANENT YELLOW EPOXY INK." at -231.34,-66.355 h1.91
  text "19)" at -237.919,-66.43 h1.91
  text "THE SCREEN PRINTING REGISTRATION ALLOWANCE IS 0.007\".  THERE SHALL BE NO INK ON ANY" at -231.34,-70.165 h1.91
  text "20)" at -237.919,-70.621 h1.91
  text "SOLDER PAD OR LAND." at -231.34,-73.974 h1.91
  text "21)" at -237.817,-77.404 h1.91
  text "THE VENDOR CODE AND UL FLAMMABILITY RATING MAY BE ETCHED IN THE FOIL OR MARKED IN" at -231.34,-77.785 h1.91
  text "PERMANENT EPOXY INK (VENDOR'S OPTION)." at -231.34,-81.594 h1.91
  text "ELECTRICAL TESTING" at -238.96,-86.674 h2.29
  text "22)" at -237.817,-91.628 h1.91
  text "ALL BOARDS SHALL BE ELECTRICALLY TESTED TO THE SUPPLIED IPC-D-356A NET LIST" at -231.34,-91.628 h1.91
  text "FOR CONTINUITY, OPENS AND SHORTS." at -231.34,-95.437 h1.91
  text "Layer Stack Up Detail for: 175-00061, rev2, PCB, NRES Crate Slot MotherBoard.PcbDoc" at -218.542,-122.799 h1.73
  text "Layer" at -218.542,-131.736 h1.73
  text "COPPER THICKNESS" at -152.044,-134.137 h2.54
  text "Name" at -218.542,-135.19 h1.73
  text "Top Layer (*.GTL)" at -218.542,-141.793 h2.41
  text "1/2 oz,  1 oz Finished" at -158.725,-142.062 h2.54
  text "MidLayer1 (*G1)" at -218.542,-152.113 h2.41
  text "1 oz" at -156.845,-152.705 h2.54
  text "1 oz" at -156.413,-162.306 h2.54
  text "InternalPlane1 (*.GP1)" at -218.542,-162.432 h2.41
  text "1 oz" at -154.534,-172.542 h2.54
  text "InternalPlane2 (*.GP2)" at -218.542,-172.752 h2.41
  text "1 oz" at -155.372,-182.982 h2.54
  text "InternalPlane3 (*.GP3)" at -218.542,-183.072 h2.41
  text "1/2 oz,  1 oz Finished" at -160.376,-191.948 h2.54
  text "Bottom Layer (*GBL)" at -218.542,-193.392 h2.41
  text "Las Cumbres Observatory, Inc." at 229.212,-201.304 h2.29
  text "Las Cumbres Observatory" at 184.254,-204.352 h3.81
  text "PRIMARY PCB SPECIFICATIONS" at -48.486,-204.733 h5.08
  text "6740 Cortona Dr." at 240.388,-205.216 h2.29
  text "Global Telescope Network" at 188.318,-208.416 h3.17
  text "Goleta, CA 93117" at 239.118,-209.026 h2.29
  text "(REFER TO COMPLETE SPEC LISTING AT LEFT FOR FURTHER DETAILS)" at -57.3,-209.94 h2.54
  text "www.lcogt.net" at 242.674,-212.734 h2.29
  text "DATE" at 179.809,-215.548 h0.81
  text "DESIGNED" at 203.685,-215.548 h0.81
  text "DRAWN" at 231.117,-215.548 h0.81
  text "SCALE" at 258.549,-215.548 h0.81
  text "NUMBER OF LAYERS" at -54.76,-216.29 h3.81
  text "6" at 35.41,-216.29 h3.81
  text "Rich Lobdill" at 238.864,-218.068 h1.4
  text "Rich Lobdill" at 210.289,-218.195 h1.4
  text "1 : 1" at 265.788,-218.551 h2.29
  text "09/26/2012" at 180.571,-218.728 h2.29
  text "FINISHED THICKNESS" at -54.76,-222.64 h3.81
  text ".062\"" at 30.965,-222.64 h3.81
  text "CHECKED/DATE" at 179.809,-222.914 h0.81
  text "APPROVED/DATE" at 231.117,-222.914 h0.81
  text "BASE MATERIAL" at -54.76,-228.99 h3.81
  text "FR4" at 29.06,-228.99 h3.81
  text "TITLE" at 179.809,-230.28 h0.81
  text "175-00061, NRES, CRATE MOTHERBOARD" at 185.397,-233.943 h2.54
  text "GOLD IMMERSION" at 16.513,-234.502 h3.81
  text "PLATING TYPE" at -54.76,-235.34 h3.81
  text "THIS DRAWING EMBODIES A PROPRIETARY DESIGN OWNED BY LAS CUMBRES" at -248.308,-235.95 h1.52
  text "OBSERVATORY.  IT IS SUBMITTED FOR A SPECIFIC PURPOSE UNDER A CON-" at -248.308,-238.49 h1.52
  text "SIZE" at 179.809,-238.662 h0.81
  text "DOC NO." at 191.493,-238.662 h0.81
  text "REV" at 244.325,-238.662 h0.81
  text "SHEET" at 256.009,-238.662 h0.81
  text "FIDENTIAL RELATIONSHIP, AND EXCEPT FOR PURPOSES EXPRESSLY GRANTED" at -248.308,-240.903 h1.52
  text "OF" at 266.931,-241.284 h1.52
  text "SOLDER MASK COLOR" at -54.76,-241.69 h3.81
  text "RED" at 32.235,-241.69 h3.81
  text "1" at 262.613,-241.792 h2.54
  text "X" at 272.773,-241.792 h2.54
  text "2" at 248.008,-242.122 h3.3
  text "-" at 205.59,-242.173 h3.3
  text "GPT" at 223.871,-242.548 h3.3
  text "C" at 183.238,-242.579 h2.54
  text "IN WRITING, ALL RIGHTS ARE RESERVED BY LAS CUMBRES OBSERVATORY." at -248.308,-243.189 h1.52
Mechanical 5:
  text "175-00061 REV2 PCB, NRES, CRATE MOTHERBOARD" at 76.479,-15.392 h2.03
  text "LAS CUMBRES OBSERVATORY     10/30/2013" at 76.966,-19.629 h2.03
Drill Drawing:
  lines w0.254: -251.102,-245.119 282.298,-245.119 282.298,161.281 -251.102,161.281 -251.102,-245.119 ; 179.301,-242.427 ccw(c180.571,-242.427) 180.571,-243.697 188.953,-243.697 ccw(c188.953,-242.681) 189.969,-242.681 189.969,-238.363 ccw(c188.953,-238.363) 188.953,-237.347 179.301,-237.347 179.301,-242.427 ; 179.301,-235.061 ccw(c180.571,-235.061) 180.571,-236.331 279.631,-236.331 ccw(c279.631,-235.061) 280.901,-235.061 280.901,-230.235 ccw(c279.631,-230.235) 279.631,-228.965 179.301,-228.965 179.301,-235.061 ; 179.301,-226.933 ccw(c180.317,-226.933) 180.317,-227.949 216.385,-227.949 ccw(c216.385,-226.679) 217.655,-226.679 217.655,-222.869 ccw(c216.385,-222.869) 216.385,-221.599 179.301,-221.599 179.301,-226.933 ; 190.985,-242.681 ccw(c192.001,-242.681) 192.001,-243.697 241.785,-243.697 ccw(c241.785,-242.681) 242.801,-242.681 242.801,-238.363 ccw(c241.785,-238.363) 241.785,-237.347 190.985,-237.347 190.985,-242.681 ; 218.671,-226.679 ccw(c219.941,-226.679) 219.941,-227.949 255.755,-227.949 ccw(c255.755,-226.679) 257.025,-226.679 257.025,-222.869 ccw(c255.755,-222.869) 255.755,-221.599 218.671,-221.599 218.671,-226.679 ; 243.817,-242.427 ccw(c245.087,-242.427) 245.087,-243.697 253.469,-243.697 ccw(c253.469,-242.681) 254.485,-242.681 254.485,-238.363 ccw(c253.469,-238.363) 253.469,-237.347 243.817,-237.347 243.817,-242.427 ; 255.501,-242.681 ccw(c256.517,-242.681) 256.517,-243.697 279.631,-243.697 ccw(c279.631,-242.427) 280.901,-242.427 280.901,-238.617 ccw(c279.631,-238.617) 279.631,-237.347 255.501,-237.347 255.501,-242.681 ; 258.041,-226.679 ccw(c259.311,-226.679) 259.311,-227.949 279.631,-227.949 ccw(c279.631,-226.679) 280.901,-226.679 280.901,-222.869 ccw(c279.631,-222.869) 279.631,-221.599 258.041,-221.599 258.041,-226.679
  lines w0.508: -250.465,-229.095 cw(c-249.197,-230.997) -249.197,-228.711 ; -249.197,-229.727 ccw(c-249.197,-230.997) -250.467,-230.997 -250.467,-243.443 ccw(c-249.197,-243.443) -249.197,-244.713 -167.917,-244.713 ccw(c-167.917,-243.443) -166.647,-243.443 -166.647,-234.807 ccw(c-167.917,-234.807) -167.917,-233.537 -234.973,-233.537 ; -166.015,-244.711 ccw(c-167.917,-243.443) -165.631,-243.443 -165.631,-234.807 ; 178.156,-244.679 cw(c180.571,-242.427) 177.269,-242.427 177.269,-221.599 cw(c179.301,-221.599) 179.301,-219.567 279.631,-219.567 cw(c279.631,-222.869) 281.883,-220.454 ; 178.285,-242.427 ccw(c180.571,-242.427) 180.571,-244.713 279.631,-244.713 ccw(c279.631,-242.427) 281.917,-242.427 281.917,-222.869 ccw(c279.631,-222.869) 279.631,-220.583 179.301,-220.583 ccw(c179.301,-221.599) 178.285,-221.599 178.285,-242.427
  lines w0.762: -263.802,-257.819 294.998,-257.819 294.998,173.981 -263.802,173.981 -263.802,-257.819
  text ".Legend" at 14.938,-140.547 h2.54
  text "DESIGNED" at 179.809,-222.914 h0.81
  text "DRAWN" at 219.179,-222.914 h0.81
  text "SCALE" at 258.549,-222.914 h0.81
  text "Rich Lobdill" at 192.154,-225.358 h1.4
  text "Rich Lobdill" at 231.803,-225.409 h1.4
  text "1 : 1" at 265.788,-225.917 h2.29
  text "TITLE" at 179.809,-230.28 h0.81
  text "175-00061, NRES, CRATE MOTHERBOARD" at 185.321,-233.943 h2.54
  text "THIS DRAWING EMBODIES A PROPRIETARY DESIGN OWNED BY LAS CUMBRES" at -248.181,-236.331 h1.52
  text "SIZE" at 179.809,-238.662 h0.81
  text "DOC NO." at 191.493,-238.662 h0.81
  text "REV" at 244.325,-238.662 h0.81
  text "SHEET" at 256.009,-238.662 h0.81
  text "OBSERVATORY.  IT IS SUBMITTED FOR A SPECIFIC PURPOSE UNDER A CON-" at -248.181,-238.871 h1.52
  text "FIDENTIAL RELATIONSHIP, AND EXCEPT FOR PURPOSES EXPRESSLY GRANTED" at -248.181,-241.284 h1.52
  text "OF" at 266.931,-241.284 h1.52
  text "2" at 262.232,-241.792 h2.54
  text "X" at 272.773,-241.792 h2.54
  text "-" at 205.59,-242.173 h3.3
  text "2" at 247.881,-242.173 h3.3
  text "C" at 183.238,-242.579 h3.05
  text "GD1" at 226.418,-242.579 h3.05
  text "IN WRITING, ALL RIGHTS ARE RESERVED BY LAS CUMBRES OBSERVATORY." at -248.181,-243.57 h1.52

## Dimensions
0,0 to 0,100 on Mechanical 2
0,100 to 222,100 on Mechanical 2

## Text inside footprints (layer, text, board x,y; h text height)
P1: Top Overlay "1" at 212.188,47.079 h1.02; Top Overlay "PCB EDGE" at 218.03,43.65 h1.27 r90; Top Overlay "13" at 199.361,35.014 h1.02; Top Overlay "16" at 199.361,64.097 h1.02; Top Overlay "4" at 200.123,46.952 h1.02; Top Overlay "12" at 199.615,51.905 h1.02; Top Overlay "14" at 199.107,41.364 h1.02; Top Overlay "15" at 199.488,57.747 h1.02
U6: Top Overlay "A1" at 103.551,55.628 h1.27 r270; Top Overlay "B1" at 123.551,55.628 h1.27 r270